# EAGLE board multiple_print_asomator (EAGLE 7.7.0)
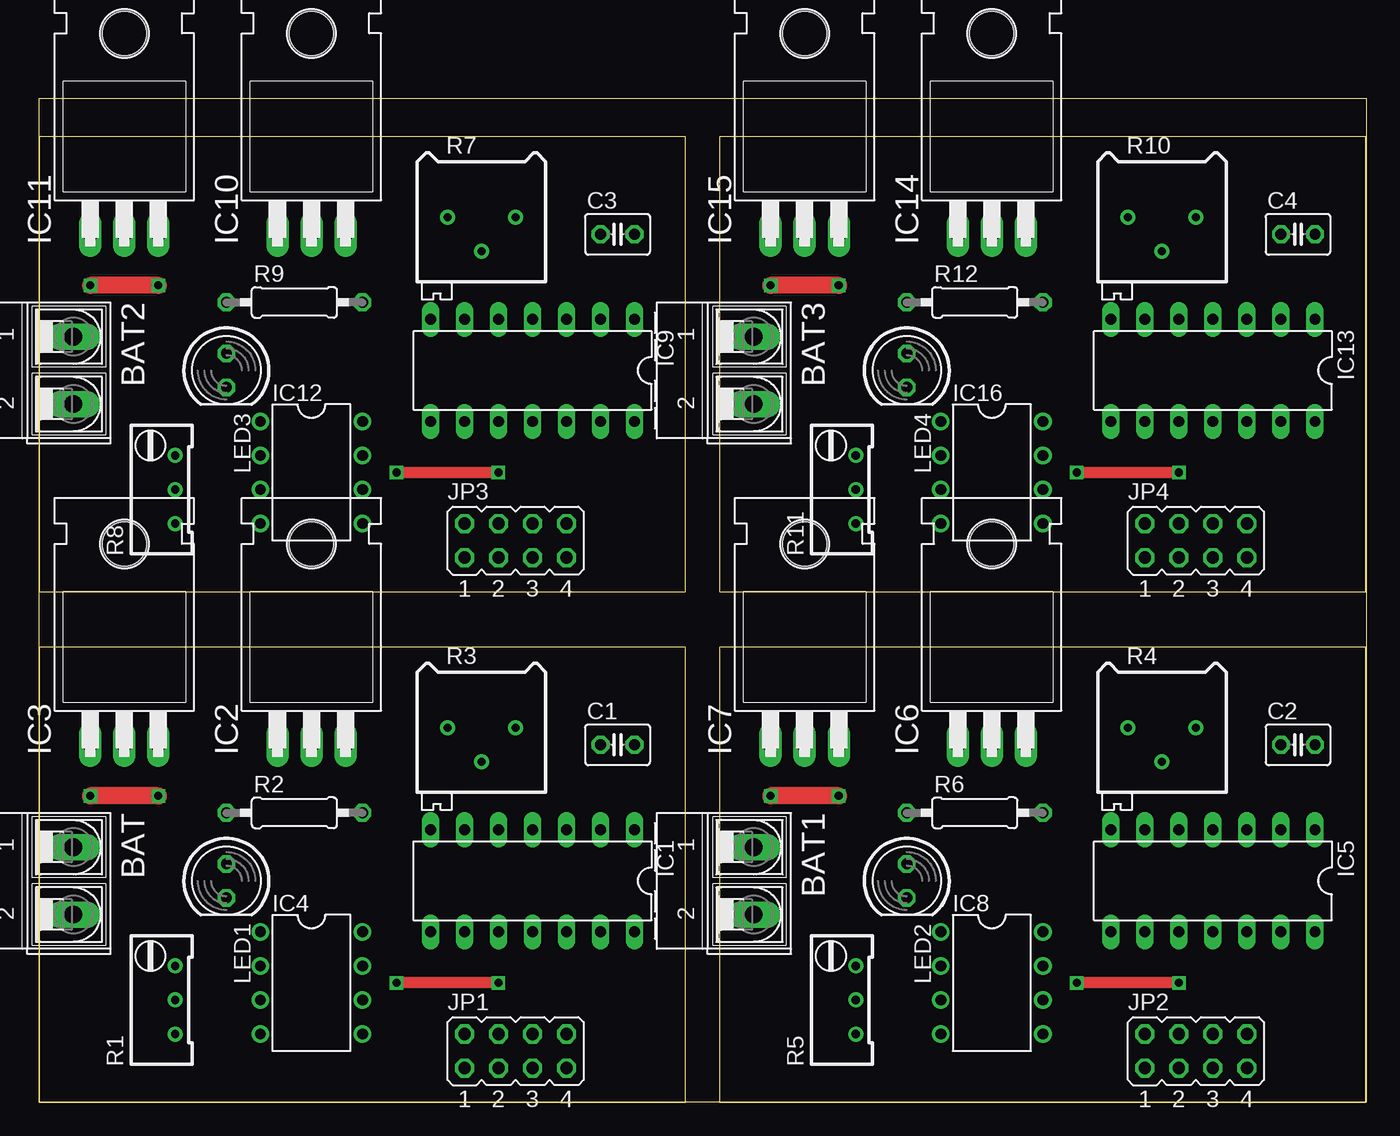
[diagram p0: board, top side]
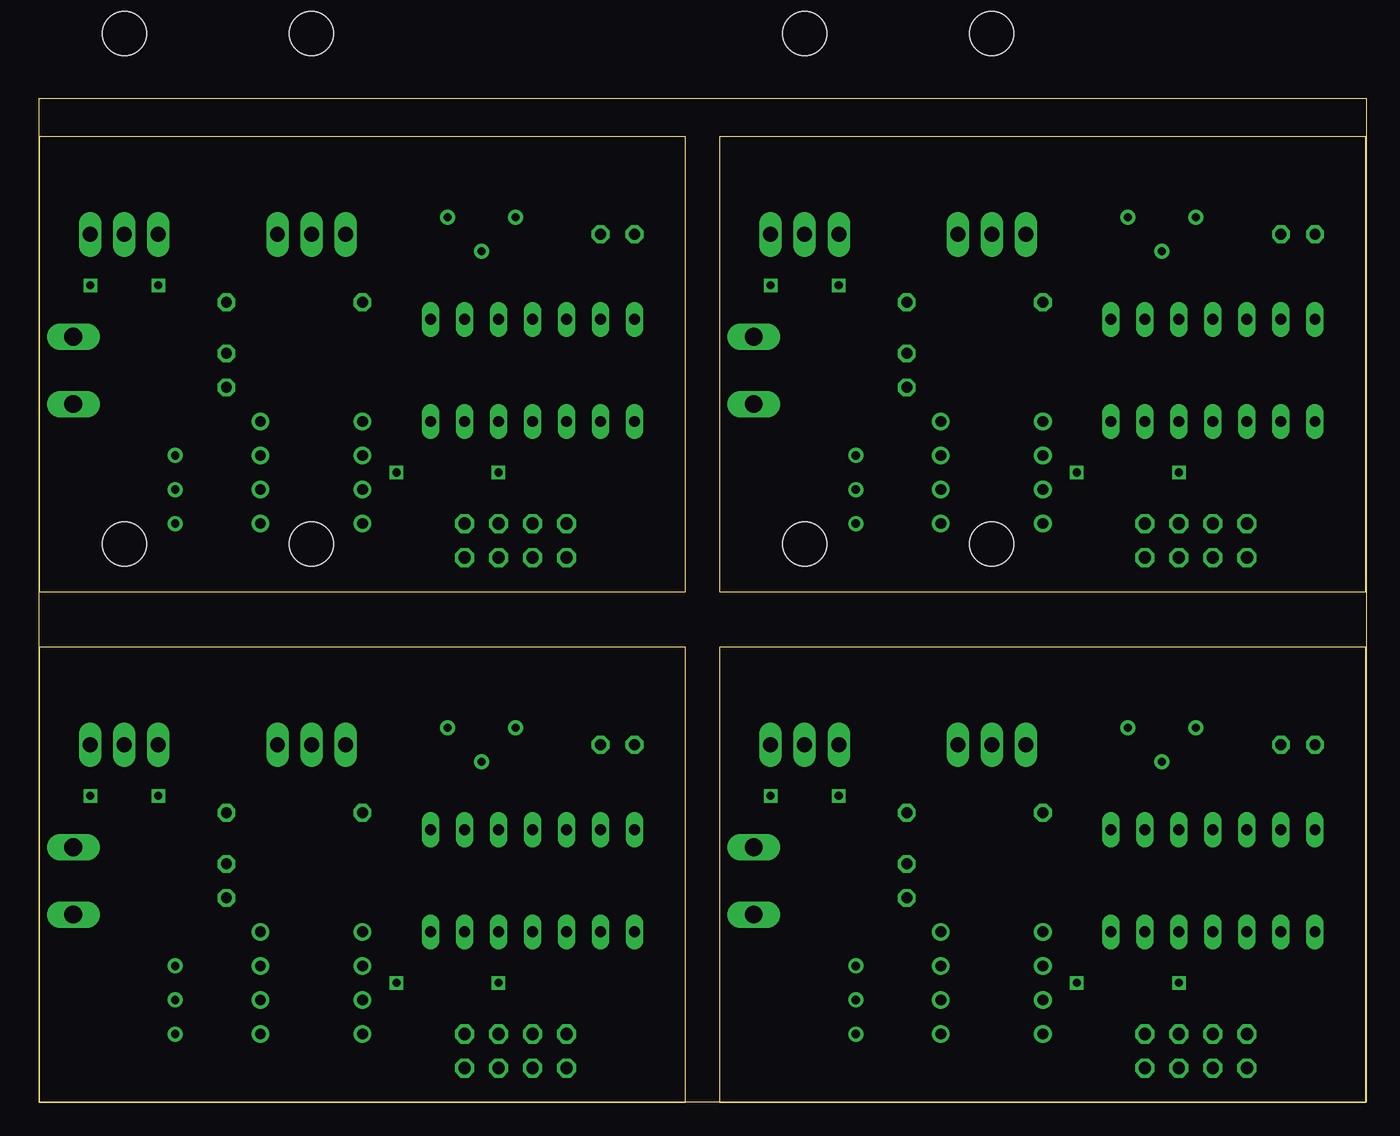
[diagram p1: board, inner layer Route2]
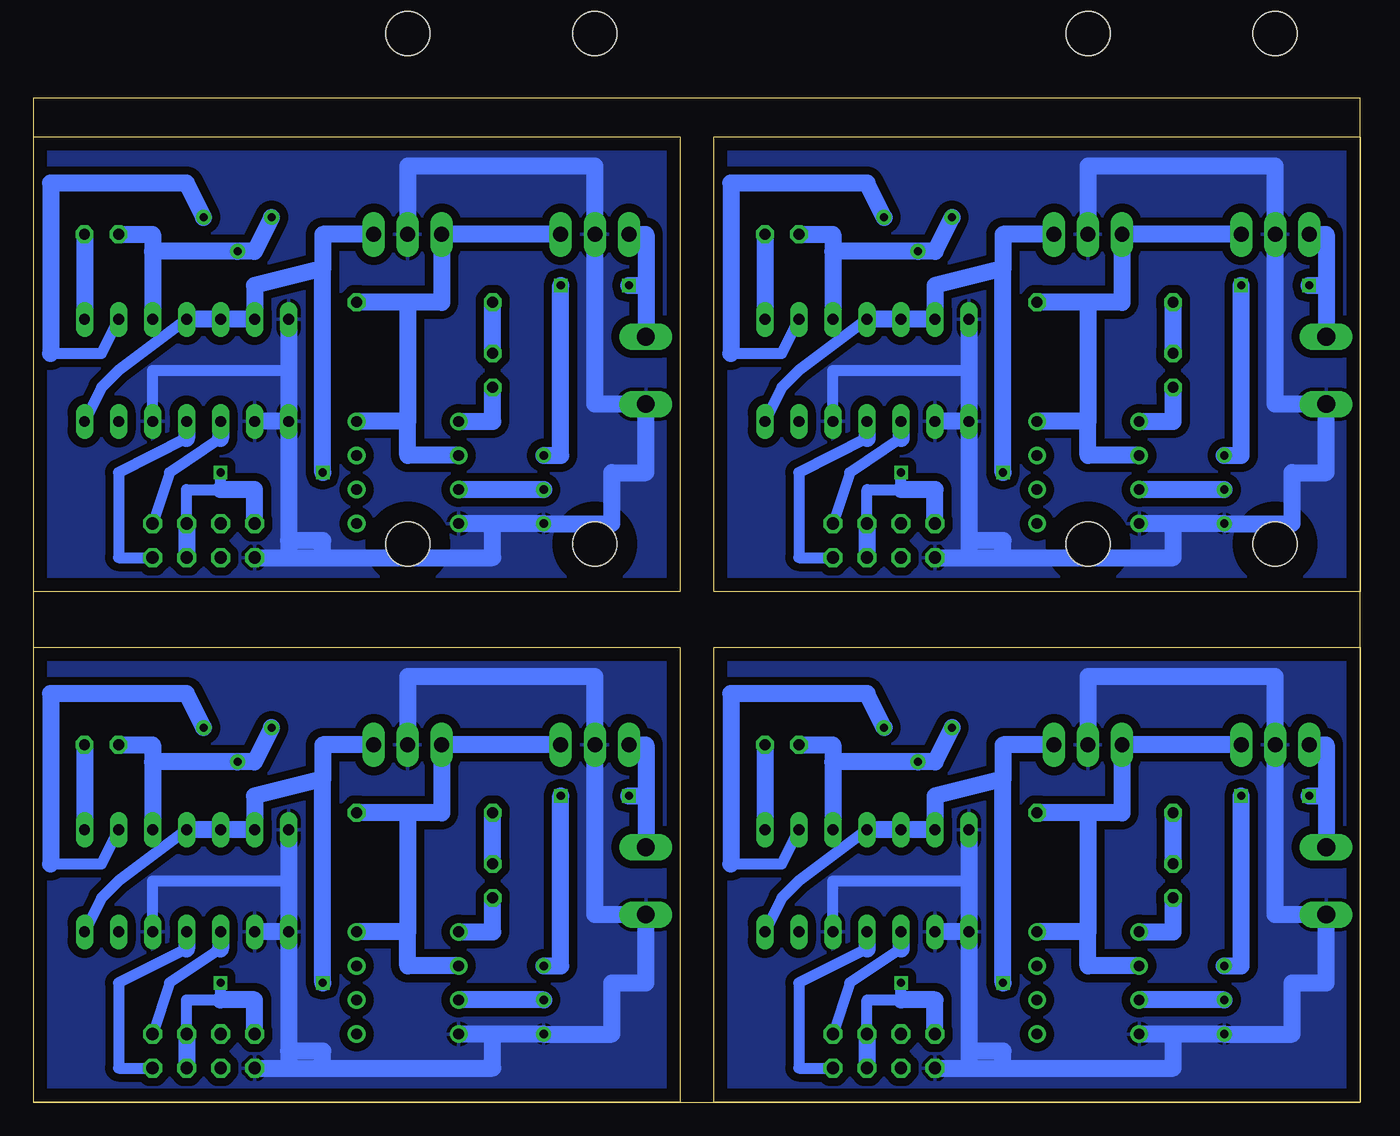
[diagram p2: board, bottom side, seen from below]

Size 99.06 x 74.93 mm. Coordinates in mm from the lower left corner, seen from the top.
Outline: 0,0 0,74.93 99.06,74.93 99.06,0 0,0
Outline: 0,0 48.24,0 48.24,33.96 0,33.96 0,0
Outline: 50.8,0 99.04,0 99.04,33.96 50.8,33.96 50.8,0
Outline: 0,38.1 48.24,38.1 48.24,72.06 0,72.06 0,38.1
Outline: 50.8,38.1 99.04,38.1 99.04,72.06 50.8,72.06 50.8,38.1
Copper layers (1*2*16): Top 0.035mm / dielectric 1.5mm / Route2 0.035mm / dielectric 0.15mm / Bottom 0.035mm
Design rules "default *": minimum track width 10mil, minimum drill 24mil, track to track 8mil, track to pad 8mil, pad to pad 8mil, via to via 8mil, smd to smd 8mil, copper to edge 40mil, drill to drill 8mil, minimum pad ring 10mil, minimum via ring 8mil, stop-mask expansion 4mil, vias tented up to drill 0mil, thermal gap 10mil

## Footprints (pad centres in the part's own frame; a part is rotated, then mirrored left to right if it is on the bottom)
AK500/2-H = drill 1.321 long: 1 -2.515,0; 2 2.515,0
C025-030X050 = drill 0.813 octagon: 1 -1.27,0; 2 1.27,0
DIL14 = drill 0.813 long: 1 -7.62,-3.81; 2 -5.08,-3.81; 3 -2.54,-3.81; 4 0,-3.81; 5 2.54,-3.81; 6 5.08,-3.81; 7 7.62,-3.81; 8 7.62,3.81; 9 5.08,3.81; 10 2.54,3.81; 11 0,3.81; 12 -2.54,3.81; 13 -5.08,3.81; 14 -7.62,3.81
TO220H = drill 1.118 long: 1 -2.54,-10.16; 2 0,-10.16; 3 2.54,-10.16 | hole 3.302: 0,4.826
DIL08 = drill 0.813 pad 1.27: 1 -3.81,-3.81; 2 -1.27,-3.81; 3 1.27,-3.81; 4 3.81,-3.81; 5 3.81,3.81; 6 1.27,3.81; 7 -1.27,3.81; 8 -3.81,3.81
JP4Q = drill 0.914 octagon: 1 -3.81,-1.27; 2 -3.81,1.27; 3 -1.27,-1.27; 4 -1.27,1.27; 5 1.27,-1.27; 6 1.27,1.27; 7 3.81,-1.27; 8 3.81,1.27
LED5MM = drill 0.813 octagon: A -1.27,0; K 1.27,0
RTRIM64W = drill 0.61: 1 1.27,-2.54; 2 1.27,0; 3 1.27,2.54
0207/10 = drill 0.813 octagon: 1 -5.08,0; 2 5.08,0
RTRIM64P = drill 0.61: 1 0,-2.54; 2 2.54,0; 3 0,2.54

## Placement (x,y rotation side)
BAT  [AK500/2-H]  2.54,16.51 270 top
BAT1  [AK500/2-H]  53.34,16.51 270 top
BAT2  [AK500/2-H]  2.54,54.61 270 top
BAT3  [AK500/2-H]  53.34,54.61 270 top
C1  [C025-030X050]  43.18,26.67 0 top
C2  [C025-030X050]  93.98,26.67 0 top
C3  [C025-030X050]  43.18,64.77 0 top
C4  [C025-030X050]  93.98,64.77 0 top
IC1  4047N  [DIL14]  36.83,16.51 180 top
IC2  7805T  [TO220H]  20.32,36.83 0 top
IC3  7812T  [TO220H]  6.35,36.83 0 top
IC4  LM358N  [DIL08]  20.32,8.89 270 top
IC5  4047N  [DIL14]  87.63,16.51 180 top
IC6  7805T  [TO220H]  71.12,36.83 0 top
IC7  7812T  [TO220H]  57.15,36.83 0 top
IC8  LM358N  [DIL08]  71.12,8.89 270 top
IC9  4047N  [DIL14]  36.83,54.61 180 top
IC10  7805T  [TO220H]  20.32,74.93 0 top
IC11  7812T  [TO220H]  6.35,74.93 0 top
IC12  LM358N  [DIL08]  20.32,46.99 270 top
IC13  4047N  [DIL14]  87.63,54.61 180 top
IC14  7805T  [TO220H]  71.12,74.93 0 top
IC15  7812T  [TO220H]  57.15,74.93 0 top
IC16  LM358N  [DIL08]  71.12,46.99 270 top
JP1  [JP4Q]  35.56,3.81 0 top
JP2  [JP4Q]  86.36,3.81 0 top
JP3  [JP4Q]  35.56,41.91 0 top
JP4  [JP4Q]  86.36,41.91 0 top
LED1  [LED5MM]  13.97,16.51 270 top
LED2  [LED5MM]  64.77,16.51 270 top
LED3  [LED5MM]  13.97,54.61 270 top
LED4  [LED5MM]  64.77,54.61 270 top
R1  [RTRIM64W]  8.89,7.62 0 top
R2  [0207/10]  19.05,21.59 0 top
R3  [RTRIM64P]  33.02,27.94 270 top
R4  [RTRIM64P]  83.82,27.94 270 top
R5  [RTRIM64W]  59.69,7.62 0 top
R6  [0207/10]  69.85,21.59 0 top
R7  [RTRIM64P]  33.02,66.04 270 top
R8  [RTRIM64W]  8.89,45.72 0 top
R9  [0207/10]  19.05,59.69 0 top
R10  [RTRIM64P]  83.82,66.04 270 top
R11  [RTRIM64W]  59.69,45.72 0 top
R12  [0207/10]  69.85,59.69 0 top

## Library data of the parts
BAT BAT1-BAT3 = con-ptr500; OC_FARNELL: unknown; OC_NEWARK: unknown
C1-C4 R1 R2 R5 R6 R8 R9 R11 R12 = rcl
IC1 IC5 IC9 IC13 = 40xx
IC2-IC4 IC6-IC8 IC10-IC12 IC14-IC16 = linear
JP1-JP4 = jumper
LED1-LED4 = led
R3 R4 R7 R10 = resistor

## Nets
+5V: IC1.4 IC1.5 IC1.6 IC1.14 IC2.3 JP1.2 JP1.5 JP1.6
+5V1: IC5.4 IC5.5 IC5.6 IC5.14 IC6.3 JP2.2 JP2.5 JP2.6
+5V2: IC9.4 IC9.5 IC9.6 IC9.14 IC10.3 JP3.2 JP3.5 JP3.6
+5V3: IC13.4 IC13.5 IC13.6 IC13.14 IC14.3 JP4.2 JP4.5 JP4.6
+12V: IC2.1 IC3.3 IC4.2 IC4.8 R2.2
+12V1: IC6.1 IC7.3 IC8.2 IC8.8 R6.2
+12V2: IC10.1 IC11.3 IC12.2 IC12.8 R9.2
+12V3: IC14.1 IC15.3 IC16.2 IC16.8 R12.2
+18V: BAT.1 IC3.1 R1.3
+18V1: BAT1.1 IC7.1 R5.3
+18V2: BAT2.1 IC11.1 R8.3
+18V3: BAT3.1 IC15.1 R11.3
GND: BAT.2 IC1.7 IC1.8 IC1.9 IC1.12 IC2.2 IC3.2 IC4.4 JP1.1 R1.1
GND1: BAT1.2 IC5.7 IC5.8 IC5.9 IC5.12 IC6.2 IC7.2 IC8.4 JP2.1 R5.1
GND2: BAT2.2 IC9.7 IC9.8 IC9.9 IC9.12 IC10.2 IC11.2 IC12.4 JP3.1 R8.1
GND3: BAT3.2 IC13.7 IC13.8 IC13.9 IC13.12 IC14.2 IC15.2 IC16.4 JP4.1 R11.1
N$1: IC1.10 JP1.8
N$2: LED1.A R2.1
N$3: IC1.11 JP1.7
N$4: IC4.1 LED1.K
N$5: IC4.3 R1.2
N$6: IC5.10 JP2.8
N$7: IC1.2 R3.3
N$8: C1.2 IC1.1
N$9: C1.1 IC1.3 R3.1 R3.2
N$10: IC5.11 JP2.7
N$11: IC5.2 R4.3
N$12: C2.2 IC5.1
N$13: C2.1 IC5.3 R4.1 R4.2
N$14: LED2.A R6.1
N$15: IC8.1 LED2.K
N$16: IC8.3 R5.2
N$17: IC9.10 JP3.8
N$18: IC9.11 JP3.7
N$19: IC9.2 R7.3
N$20: C3.2 IC9.1
N$21: C3.1 IC9.3 R7.1 R7.2
N$22: LED3.A R9.1
N$23: IC12.1 LED3.K
N$24: IC12.3 R8.2
N$25: IC13.10 JP4.8
N$26: IC13.11 JP4.7
N$27: IC13.2 R10.3
N$28: C4.2 IC13.1
N$29: C4.1 IC13.3 R10.1 R10.2
N$30: LED4.A R12.1
N$31: IC16.1 LED4.K
N$32: IC16.3 R11.2

## Tracks (layer width: path | path; a pad name or v marks a point on that pad's centre or on a via)
+5V  (via drill 0.6)
  Top 0.813: v34.29,8.89 v26.67,8.89
  Bottom 0.813: IC1.4 41.91,16.51 43.18,15.24 IC1.14 | JP1.6 36.83,7.62 34.29,7.62 v34.29,8.89
  Bottom 1.27: IC2.3 26.67,26.67 26.67,24.13 | 26.67,24.13 31.75,22.86 IC1.6 IC1.5 IC1.4 | JP1.6 JP1.5 | v26.67,8.89 26.67,24.13 | JP1.2 31.75,7.62 34.29,7.62
+5V1  (via drill 0.6)
  Top 0.813: v85.09,8.89 v77.47,8.89
  Bottom 0.813: IC5.4 92.71,16.51 93.98,15.24 IC5.14 | JP2.6 87.63,7.62 85.09,7.62 v85.09,8.89
  Bottom 1.27: IC6.3 77.47,26.67 77.47,24.13 | 77.47,24.13 82.55,22.86 IC5.6 IC5.5 IC5.4 | JP2.6 JP2.5 | v77.47,8.89 77.47,24.13 | JP2.2 82.55,7.62 85.09,7.62
+5V2  (via drill 0.6)
  Top 0.813: v34.29,46.99 v26.67,46.99
  Bottom 0.813: IC9.4 41.91,54.61 43.18,53.34 IC9.14 | JP3.6 36.83,45.72 34.29,45.72 v34.29,46.99
  Bottom 1.27: IC10.3 26.67,64.77 26.67,62.23 | 26.67,62.23 31.75,60.96 IC9.6 IC9.5 IC9.4 | JP3.6 JP3.5 | v26.67,46.99 26.67,62.23 | JP3.2 31.75,45.72 34.29,45.72
+5V3  (via drill 0.6)
  Top 0.813: v85.09,46.99 v77.47,46.99
  Bottom 0.813: IC13.4 92.71,54.61 93.98,53.34 IC13.14 | JP4.6 87.63,45.72 85.09,45.72 v85.09,46.99
  Bottom 1.27: IC14.3 77.47,64.77 77.47,62.23 | 77.47,62.23 82.55,60.96 IC13.6 IC13.5 IC13.4 | JP4.6 JP4.5 | v77.47,46.99 77.47,62.23 | JP4.2 82.55,45.72 85.09,45.72
+12V
  Bottom 1.27: IC3.3 IC2.1 17.78,21.59 20.32,21.59 | IC4.2 20.32,10.16 20.32,12.7 | 20.32,12.7 IC4.8 | 20.32,21.59 20.32,12.7 | 20.32,21.59 R2.2
+12V1
  Bottom 1.27: IC7.3 IC6.1 68.58,21.59 71.12,21.59 | IC8.2 71.12,10.16 71.12,12.7 | 71.12,12.7 IC8.8 | 71.12,21.59 71.12,12.7 | 71.12,21.59 R6.2
+12V2
  Bottom 1.27: IC11.3 IC10.1 17.78,59.69 20.32,59.69 | IC12.2 20.32,48.26 20.32,50.8 | 20.32,50.8 IC12.8 | 20.32,59.69 20.32,50.8 | 20.32,59.69 R9.2
+12V3
  Bottom 1.27: IC15.3 IC14.1 68.58,59.69 71.12,59.69 | IC16.2 71.12,48.26 71.12,50.8 | 71.12,50.8 IC16.8 | 71.12,59.69 71.12,50.8 | 71.12,59.69 R12.2
+18V  (via drill 0.6)
  Top 1.27: v8.89,22.86 v3.81,22.86
  Bottom 1.27: IC3.1 2.54,26.67 2.54,22.86 | 2.54,22.86 BAT.1 | R1.3 8.89,10.16 v8.89,22.86 | v3.81,22.86 2.54,22.86
+18V1  (via drill 0.6)
  Top 1.27: v59.69,22.86 v54.61,22.86
  Bottom 1.27: IC7.1 53.34,26.67 53.34,22.86 | 53.34,22.86 BAT1.1 | R5.3 59.69,10.16 v59.69,22.86 | v54.61,22.86 53.34,22.86
+18V2  (via drill 0.6)
  Top 1.27: v8.89,60.96 v3.81,60.96
  Bottom 1.27: IC11.1 2.54,64.77 2.54,60.96 | 2.54,60.96 BAT2.1 | R8.3 8.89,48.26 v8.89,60.96 | v3.81,60.96 2.54,60.96
+18V3  (via drill 0.6)
  Top 1.27: v59.69,60.96 v54.61,60.96
  Bottom 1.27: IC15.1 53.34,64.77 53.34,60.96 | 53.34,60.96 BAT3.1 | R11.3 59.69,48.26 v59.69,60.96 | v54.61,60.96 53.34,60.96
GND
  Bottom 0.813: IC1.12 39.37,16.51 29.21,16.51
  Bottom 1.27: IC2.2 20.32,31.75 6.35,31.75 IC3.2 6.35,13.99 BAT.2 2.54,8.89 5.08,8.89 5.08,5.08 R1.1 13.97,5.08 | 13.97,5.08 IC4.4 | JP1.1 29.21,2.54 | 29.21,2.54 26.67,2.54 | 26.67,2.54 13.97,2.54 13.97,5.08 | IC1.7 29.21,16.51 IC1.8 | IC1.8 29.21,3.81 | 29.21,3.81 29.21,2.54 | IC1.8 IC1.9 | 26.67,2.54 26.67,3.81 29.21,3.81
  pour Bottom (isolate 0.61): 0,0 48.26,0 48.26,34.29 0,34.29
GND1
  Bottom 0.813: IC5.12 90.17,16.51 80.01,16.51
  Bottom 1.27: IC6.2 71.12,31.75 57.15,31.75 IC7.2 57.15,13.99 BAT1.2 53.34,8.89 55.88,8.89 55.88,5.08 R5.1 64.77,5.08 | 64.77,5.08 IC8.4 | JP2.1 80.01,2.54 | 80.01,2.54 77.47,2.54 | 77.47,2.54 64.77,2.54 64.77,5.08 | IC5.7 80.01,16.51 IC5.8 | IC5.8 80.01,3.81 | 80.01,3.81 80.01,2.54 | IC5.8 IC5.9 | 77.47,2.54 77.47,3.81 80.01,3.81
  pour Bottom (isolate 0.61): 50.8,0 99.06,0 99.06,34.29 50.8,34.29
GND2
  Bottom 0.813: IC9.12 39.37,54.61 29.21,54.61
  Bottom 1.27: IC10.2 20.32,69.85 6.35,69.85 IC11.2 6.35,52.09 BAT2.2 2.54,46.99 5.08,46.99 5.08,43.18 R8.1 13.97,43.18 | 13.97,43.18 IC12.4 | JP3.1 29.21,40.64 | 29.21,40.64 26.67,40.64 | 26.67,40.64 13.97,40.64 13.97,43.18 | IC9.7 29.21,54.61 IC9.8 | IC9.8 29.21,41.91 | 29.21,41.91 29.21,40.64 | IC9.8 IC9.9 | 26.67,40.64 26.67,41.91 29.21,41.91
  pour Bottom (isolate 0.61): 0,38.1 48.26,38.1 48.26,72.39 0,72.39
GND3
  Bottom 0.813: IC13.12 90.17,54.61 80.01,54.61
  Bottom 1.27: IC14.2 71.12,69.85 57.15,69.85 IC15.2 57.15,52.09 BAT3.2 53.34,46.99 55.88,46.99 55.88,43.18 R11.1 64.77,43.18 | 64.77,43.18 IC16.4 | JP4.1 80.01,40.64 | 80.01,40.64 77.47,40.64 | 77.47,40.64 64.77,40.64 64.77,43.18 | IC13.7 80.01,54.61 IC13.8 | IC13.8 80.01,41.91 | 80.01,41.91 80.01,40.64 | IC13.8 IC13.9 | 77.47,40.64 77.47,41.91 80.01,41.91
  pour Bottom (isolate 0.61): 50.8,38.1 99.06,38.1 99.06,72.39 50.8,72.39
N$1
  Bottom 0.813: 34.29,11.43 38.1,8.89 JP1.8
  Bottom 1.27: IC1.10 34.29,11.43
N$2
  Bottom 1.27: LED1.A R2.1
N$3
  Bottom 0.813: 36.83,11.43 41.91,8.89 41.91,2.54 JP1.7
  Bottom 1.27: IC1.11 36.83,11.43
N$4
  Bottom 1.27: IC4.1 13.97,12.7 LED1.K
N$5
  Bottom 1.27: R1.2 IC4.3
N$6
  Bottom 0.813: 85.09,11.43 88.9,8.89 JP2.8
  Bottom 1.27: IC5.10 85.09,11.43
N$7
  Bottom 0.813: 46.99,17.78 43.18,17.78 IC1.2
  Bottom 1.27: R3.3 36.83,30.48 46.99,30.48 46.99,17.78
N$8
  Bottom 1.27: C1.2 IC1.1
N$9
  Bottom 1.27: R3.1 31.75,25.4 R3.2 39.37,25.4 | C1.1 39.37,26.67 39.37,25.4 | 39.37,25.4 IC1.3
N$10
  Bottom 0.813: 87.63,11.43 92.71,8.89 92.71,2.54 JP2.7
  Bottom 1.27: IC5.11 87.63,11.43
N$11
  Bottom 0.813: 97.79,17.78 93.98,17.78 IC5.2
  Bottom 1.27: R4.3 87.63,30.48 97.79,30.48 97.79,17.78
N$12
  Bottom 1.27: C2.2 IC5.1
N$13
  Bottom 1.27: R4.1 82.55,25.4 R4.2 90.17,25.4 | C2.1 90.17,26.67 90.17,25.4 | 90.17,25.4 IC5.3
N$14
  Bottom 1.27: LED2.A R6.1
N$15
  Bottom 1.27: IC8.1 64.77,12.7 LED2.K
N$16
  Bottom 1.27: R5.2 IC8.3
N$17
  Bottom 0.813: 34.29,49.53 38.1,46.99 JP3.8
  Bottom 1.27: IC9.10 34.29,49.53
N$18
  Bottom 0.813: 36.83,49.53 41.91,46.99 41.91,40.64 JP3.7
  Bottom 1.27: IC9.11 36.83,49.53
N$19
  Bottom 0.813: 46.99,55.88 43.18,55.88 IC9.2
  Bottom 1.27: R7.3 36.83,68.58 46.99,68.58 46.99,55.88
N$20
  Bottom 1.27: C3.2 IC9.1
N$21
  Bottom 1.27: R7.1 31.75,63.5 R7.2 39.37,63.5 | C3.1 39.37,64.77 39.37,63.5 | 39.37,63.5 IC9.3
N$22
  Bottom 1.27: LED3.A R9.1
N$23
  Bottom 1.27: IC12.1 13.97,50.8 LED3.K
N$24
  Bottom 1.27: R8.2 IC12.3
N$25
  Bottom 0.813: 85.09,49.53 88.9,46.99 JP4.8
  Bottom 1.27: IC13.10 85.09,49.53
N$26
  Bottom 0.813: 87.63,49.53 92.71,46.99 92.71,40.64 JP4.7
  Bottom 1.27: IC13.11 87.63,49.53
N$27
  Bottom 0.813: 97.79,55.88 93.98,55.88 IC13.2
  Bottom 1.27: R10.3 87.63,68.58 97.79,68.58 97.79,55.88
N$28
  Bottom 1.27: C4.2 IC13.1
N$29
  Bottom 1.27: R10.1 82.55,63.5 R10.2 90.17,63.5 | C4.1 90.17,64.77 90.17,63.5 | 90.17,63.5 IC13.3
N$30
  Bottom 1.27: LED4.A R12.1
N$31
  Bottom 1.27: IC16.1 64.77,50.8 LED4.K
N$32
  Bottom 1.27: R11.2 IC16.3
S$1
  Route2 0: 0,0 0,74.93 99.06,74.93 99.06,0 0,0